# Altium PCB Controller.PcbDoc
Units mil, origin at the board's own origin, x right, y up, seen from the top; angles counter-clockwise.
Board outline 960 x 1540 mil, 2 copper layers (Top Layer, Bottom Layer); 6 components, 9 nets, 53 pads, 4 vias.
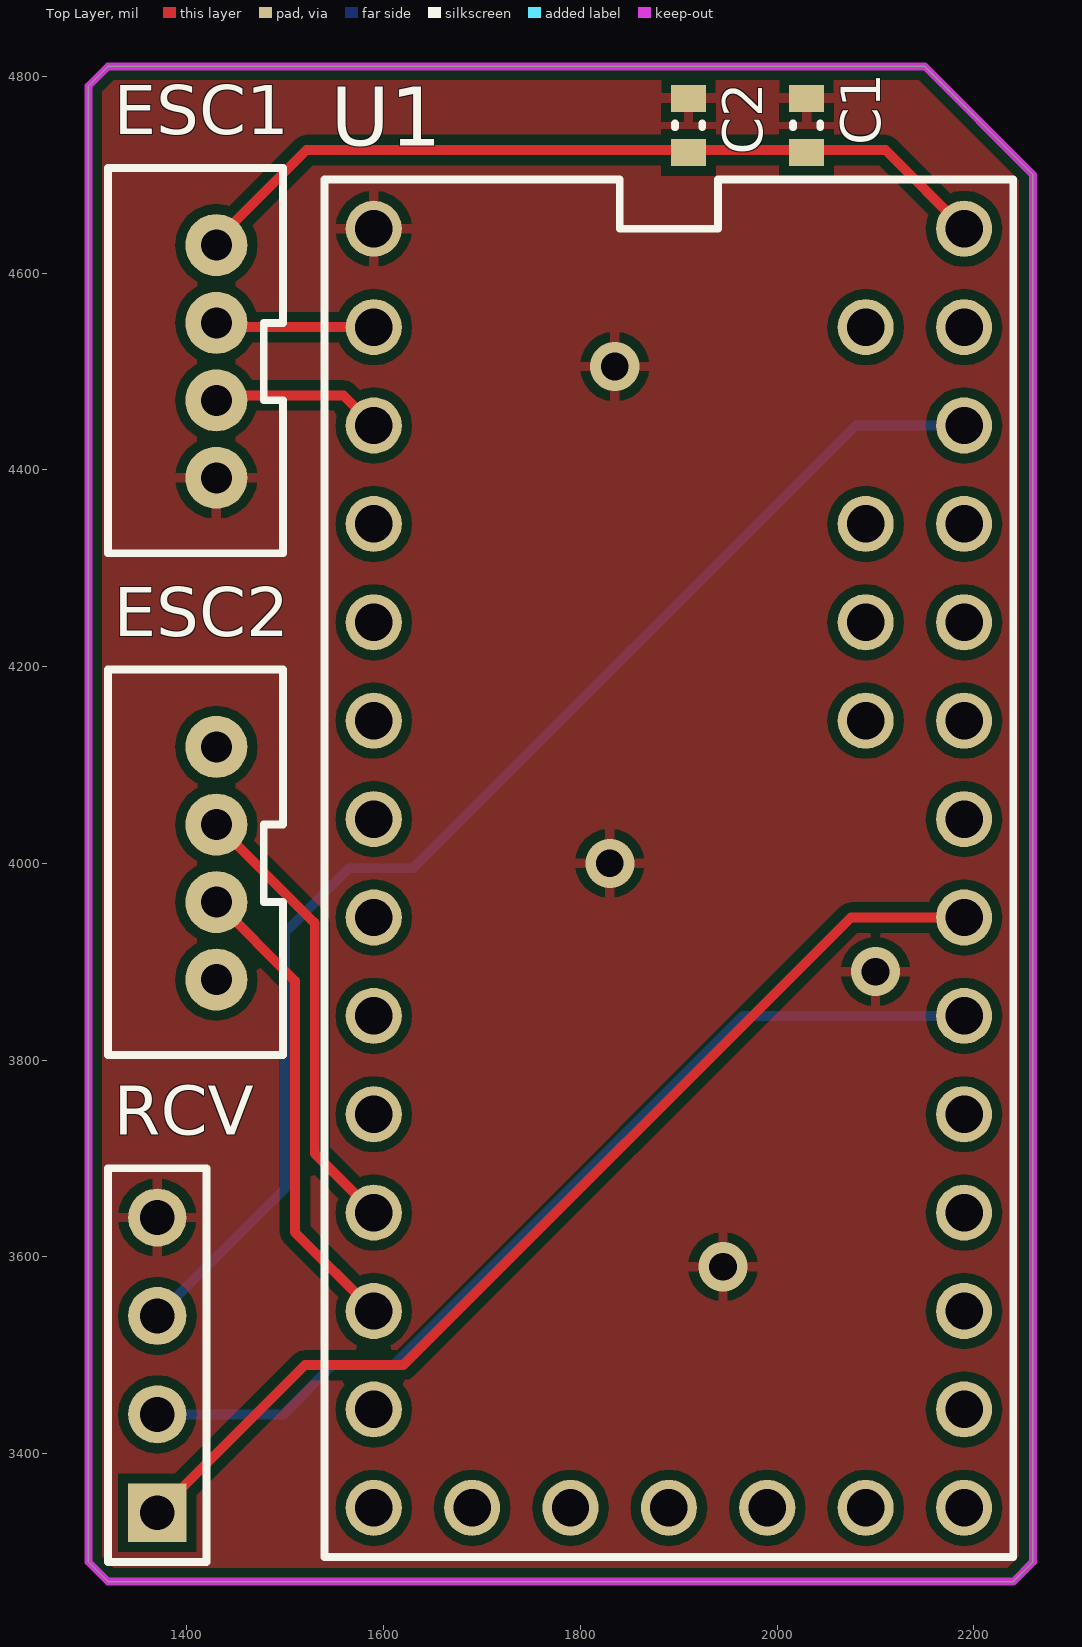
[diagram p0: Top Layer view]
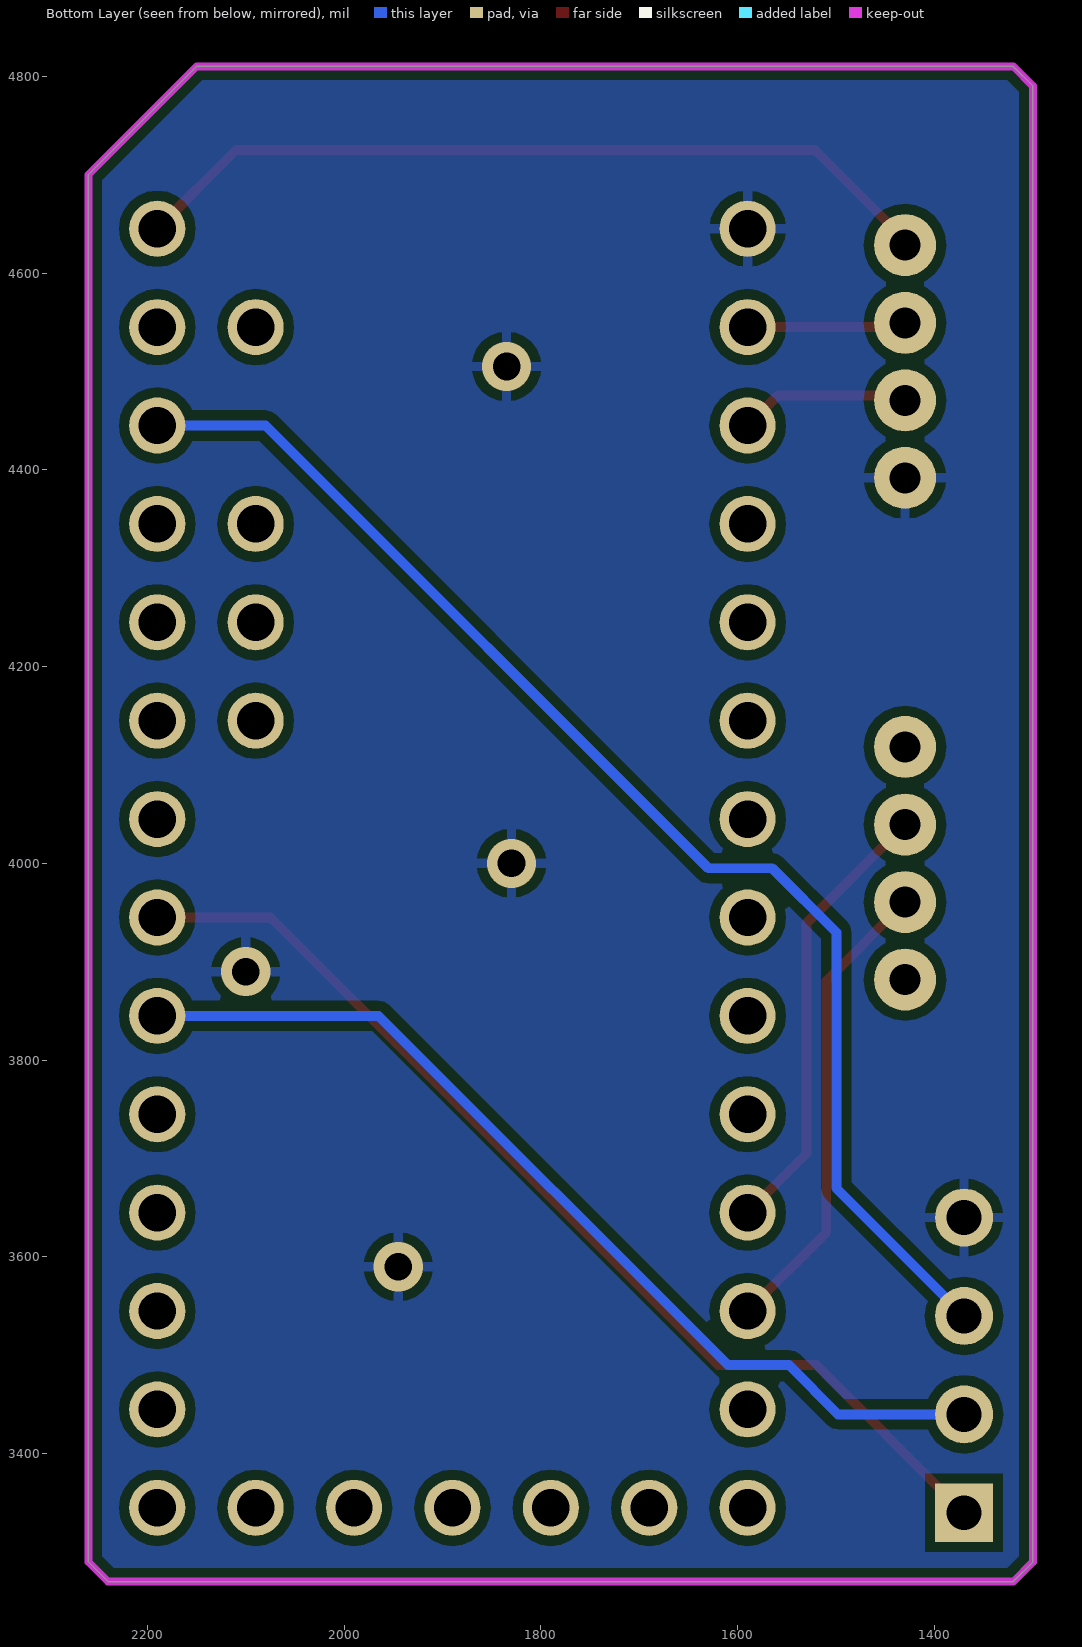
[diagram p1: Bottom Layer view, seen from below]

## Layer stack, top to bottom
Top Solder: solder mask 0.4, Solder Resist, Dk 3.5
Top Layer: signal copper 1.4
Dielectric 1: dielectric 12.6, FR-4, Dk 4.8
Bottom Layer: signal copper 1.4
Bottom Solder: solder mask 0.4, Solder Resist, Dk 3.5

## Board outline
1320,3270 1300,3290 1300,4790 1320,4810 2150,4810 2260,4700 2260,3290 2240,3270

## Design rules (kind name [scope] priority, off if disabled: settings)
Clearance [All] p1: gap=10
PolygonConnect [All] p1: connectstyle=Relief reliefconductorwidth=10 reliefentries=4 polygonreliefangle="90 Angle" airgapwidth=10
RoutingVias [All] p1: holewidth=28 width=50 viastyle="Through Hole" minholewidth=28 minwidth=50 maxholewidth=28 maxwidth=50
SolderMaskExpansion [All] p1: expansion=4
Width [All] p1: maxlimit=10 minlimit=10 preferedwidth=10
30 further rules are at their usual default settings.

## Components (designator, comment, footprint, x,y, rotation, side; value= is the part's Value field where it differs from the comment)
C1 "2.2uF" CAPC0603(1608)100_L 2030,4750 r270 top
C2 "2.2uF" CAPC0603(1608)100_L 1910,4750 r270 top
ESC1 "" JST-4-PTH-VERT 1430,4510 r90 top (schematic designator JP1)
ESC2 "" JST-4-PTH-VERT 1430,4000 r90 top (schematic designator JP2)
RCV "Header 4" HDR1X4 1370,3340 r90 top (schematic designator P1)
U1 "" TEENSY_3.0+4 1890,3995 r0 top

## Footprints (in the part's own frame and the unit in brackets; to place one, negate y for a bottom-side part, rotate by r counter-clockwise, add the part's x,y. Pads: shape width x height; smd on the part's side, far side on the other; paste and mask are expansions set on the pad)
CAPC0603(1608)100_L [mm] "Chip Capacitor, Body 1.6x0.8mm, Height 1.0mm, IPC High Density"
  rect 0.7x0.9 smd: 1(-0.7,0) 2(0.7,0)
  silkscreen extent -0.05,-0.35 0.05,0.35, body extent -0.87,-0.47 0.88,0.48, height 1
HDR1X4 [mm] "Connector; Header; 4 Position"
  rect 1.5x1.5 hole 0.9: 1(0,0)
  round 1.5 hole 0.9: 2(2.54,0) 3(5.08,0) 4(7.62,0)
  silkscreen extent -1.27,-1.27 8.89,1.27
JST-4-PTH-VERT [mil]
  round 63 hole 31.5: 1(-118.11,0) 2(-39.37,0) 3(39.37,0) 4(118.37,0)
  silkscreen extent -195,-68 197,110, body extent -195,-67 195,110, height 236
TEENSY_3.0+4 [mil]
  round 57 hole 38: 0(-300,550) 1(-300,450) 2(-300,350) 3(-300,250) 3.3V(300,450) 3.3V1(-100,-650) 4(-300,150) 5(-300,50) 6(-300,-50) 7(-300,-150) 8(-300,-250) 9(-300,-350) 10(-300,-450) 11(-300,-550) 12(-300,-650) 13(300,-650) 14/A0(300,-550) 15/A1(300,-450) 16/A2(300,-350) 17/A3(300,-250) 18/A4(300,-150) 19/A5(300,-50) 20/A6(300,50) 21/A7(300,150) 22/A8(300,250) 23/A9(300,350) A10(200,250) A11(200,150) AGND(300,550) AREF(200,350) GND(-300,650) GND1(0,-650) PGM(100,-650) RESET(200,-650) VBAT(-200,-650) VIN(300,650) VUSB(200,550)
  silkscreen extent -350,-700 350,700

## Part data
C1 C2: library part CMP-1035-02754-1, "CAP 2.2uF 6.3V ±10% 0603 (1608 Metric) Thickness 1mm SMD"
ESC1 ESC2: library part JST_4_VERT
RCV: "Header, 4-Pin"
U1: library part TEENSY_3.0+4

## Via types
v1: diameter 50, hole 28, Top Layer to Bottom Layer, 4 vias

## Nets (pads, with @x,y where several pads share a name; then routed paths per layer and width w, separated by ;. In a path a pad name is that pad's centre, name@x,y a point inside that pad or via, vN(x,y) a via of type N, cw(c..) or ccw(c..) an arc to the next point about the centre after c; other vN are vias at no path point)
3V3: RCV.3 U1.3.3V | length 1367.2
  Bottom Layer w10: RCV.3@1370,3520 RCV.3 1499.71,3669.71 1499.71,3929.71 1565,3995 1630,3995 2080,4445 U1.3.3V
GND: C1.1 C2.1 ESC1.1 RCV.4 U1.GND
  other v1: 1945,3590 2100,3890 1830,4000 1835,4505
SCL: RCV.1 U1.19/A5 | length 1087.3
  Top Layer w10: RCV.1@1378,3320 1378,3348 1520,3490 1620,3490 2075,3945 U1.19/A5
SDA: RCV.2 U1.18/A4 | length 996
  Bottom Layer w10: RCV.2@1370,3420 1390,3440 1498,3440 1548,3490 1610,3490 1965,3845 U1.18/A4
SER_RX_1: ESC1.3 U1.0 | length 160
  Top Layer w10: ESC1.3@1430,4545 U1.0
SER_RX_2: ESC2.3 U1.9 | length 460.6
  Top Layer w10: ESC2.3 1525.29,3944.08 1530,3939.37 1530,3705 U1.9
SER_TX_1: ESC1.2 U1.1 | length 172.7
  Top Layer w10: ESC1.2@1430,4475.63 1559.37,4475.63 U1.1
SER_TX_2: ESC2.2 U1.10 | length 481.9
  Top Layer w10: ESC2.2 1510,3880.63 1510,3625 U1.10
VCC: C1.2 C2.2 ESC1.4 U1.VIN | length 831.1
  Top Layer w10: ESC1.4@1430,4633.37 1521.63,4725 2110,4725 U1.VIN
pads on no net: ESC2.1 ESC2.4 U1.2 U1.3 U1.3.3V1 U1.4 U1.5 U1.6 U1.7 U1.8 U1.11 U1.12 U1.13 U1.14/A0 U1.15/A1 U1.16/A2 U1.17/A3 U1.20/A6 U1.21/A7 U1.22/A8 U1.23/A9 U1.A10 U1.A11 U1.AGND U1.AREF U1.GND1 U1.PGM U1.RESET U1.VBAT U1.VUSB

## Polygon pours and split planes (outlines as drawn)
GND on Top Layer "GND_L01_P000" (solid, remove dead copper, pour order 0): 1220,4780 1275,4835 2160,4835 2295,4700 2300,4695 2300,3350 2300,3300 2250,3250 2220,3220 1260,3220 1220,3260
GND on Bottom Layer "GND_L02_P002" (solid, remove dead copper, pour order 2): 1220.47,4780.47 1275,4835 2160,4835 2295.47,4699.53 2300.47,4694.53 2300.47,3349.53 2300.47,3299.53 2250.47,3249.53 2220.47,3219.53 1260.47,3219.53 1220.47,3259.53

## Keep-outs
Keep-Out Layer:
  the board outline again, w7.87